# Altium PCB racer_pcb.PcbDoc (part 2 of 2)
Units mm, origin at the board's own origin, x right, y up, seen from the top; angles counter-clockwise.
Board outline 64 x 85 mm, 4 copper layers (Top Layer, Ground Plane, Power Plane, Bottom Layer), stack 0.844 mm thick; 108 components, 67 nets, 325 pads, 88 vias.
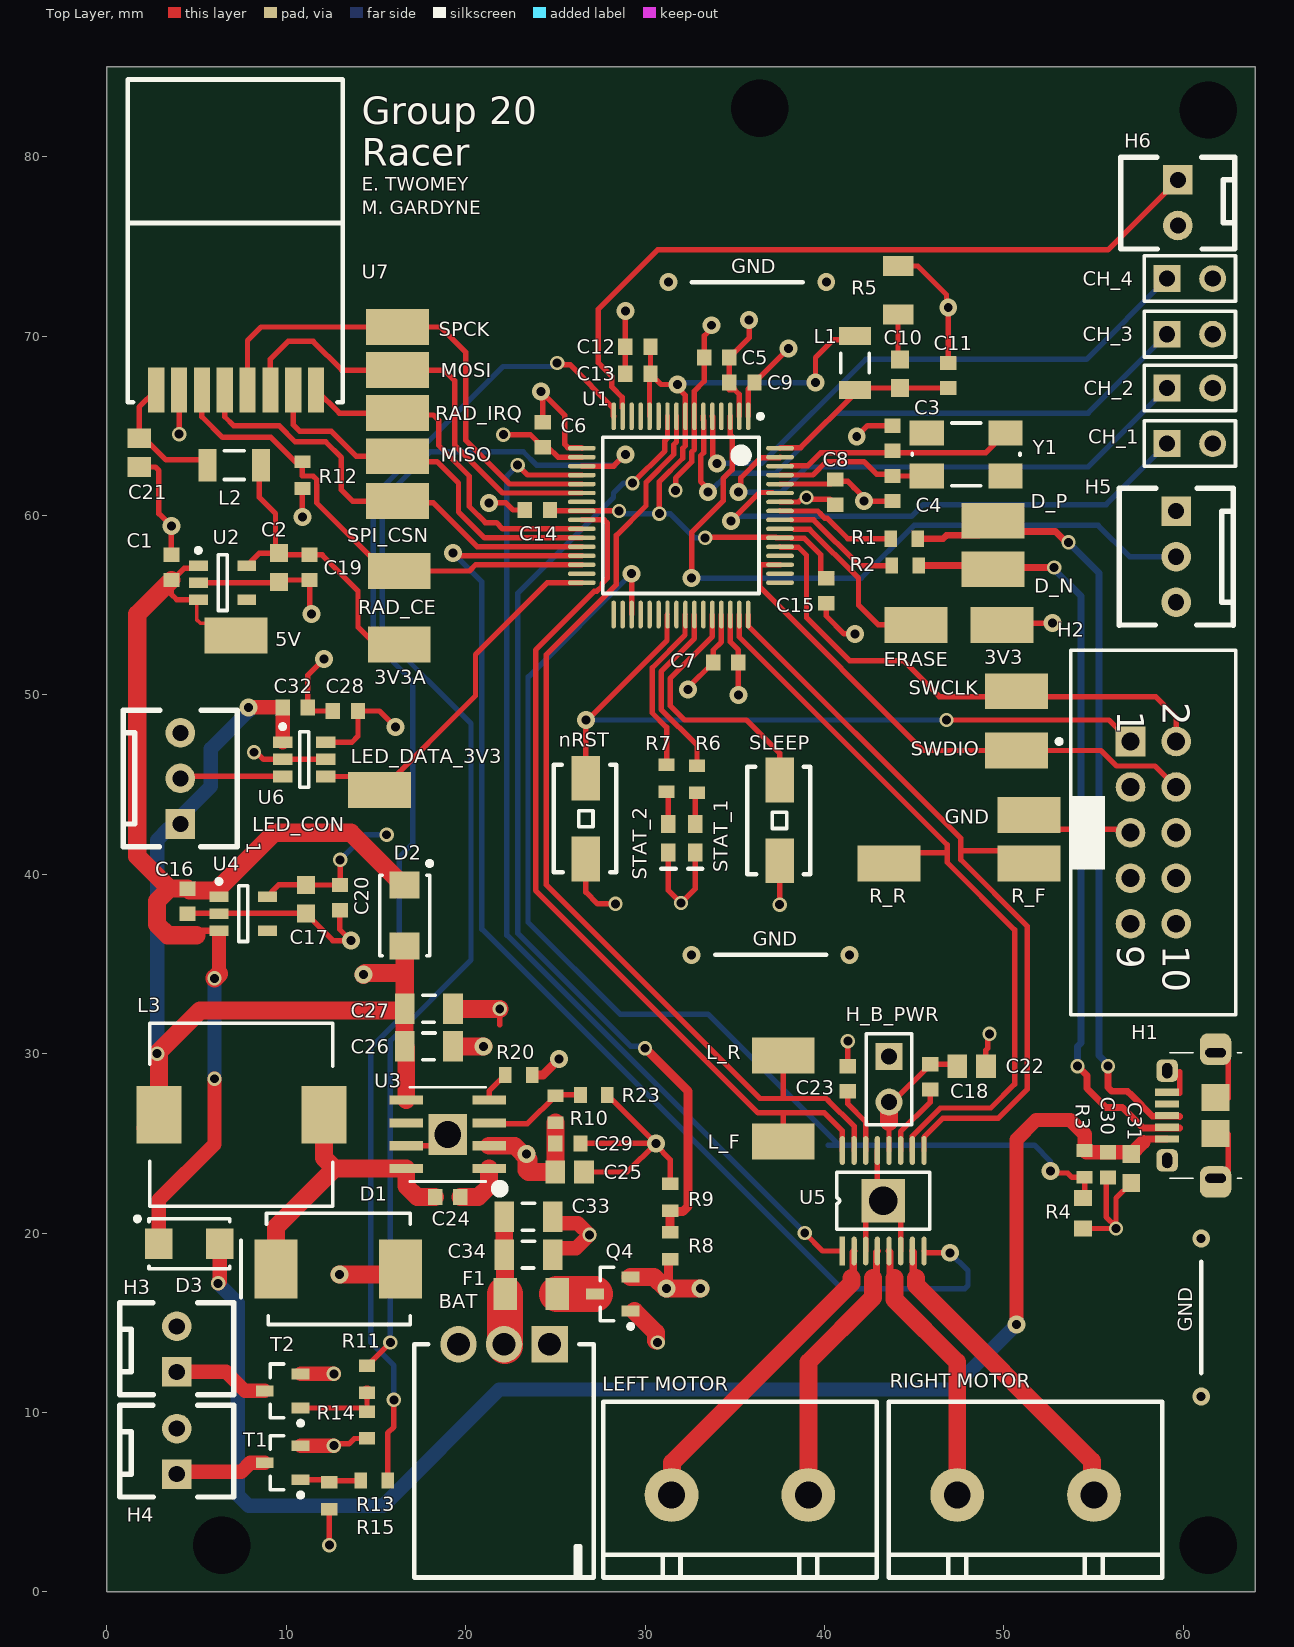
[diagram p0: Top Layer view]

## Polygon pours and split planes (outlines as drawn) (continued)
5V_REG on Power Plane (split plane): 14.371,58.846 14.371,41.4 14.38,41.35 14.408,41.308 24.287,31.429 22.4,31.429 22.35,31.42 22.308,31.392 21.979,31.062 21.951,31.02 21.941,30.971 21.941,16 21.951,15.95 21.979,15.908 22.021,15.88 22.071,15.871 42.3,15.871 42.35,15.88 42.392,15.908 45.992,19.508 46.02,19.55 46.029,19.6 46.029,31.171 63.49,31.171 63.49,2.484 61.605,0.51 0.51,0.51 0.51,61.171 12.046,61.171
3V3D on Power Plane (split plane): 63.49,82.738 63.49,31.429 24.654,31.429 14.629,41.454 14.629,58.9 14.62,58.95 14.592,58.992 12.192,61.392 12.15,61.42 12.1,61.429 0.51,61.429 0.51,66.5 13.2,66.5 13.2,71.9 23.9,71.9 30.1,78.1 30.1,84.49 62.088,84.49

## Other copper
Top Layer:
  pour cut-out: 0.1,72 0.2,71.9 24,71.9 30.2,78.1 30.2,85 0.1,85
Bottom Layer:
  pour cut-out: 0.1,72 0.2,71.9 24,71.9 30.2,78.1 30.2,85 0.1,85
Ground Plane (plane layer: these items are gaps in the copper):
  pour cut-out: 61.4,0.4 63.5,0.4 63.5,2.6
  pour cut-out: 61.89,84.69 63.49,84.69 63.59,84.59 63.49,84.49 63.49,82.69
  pour cut-out: 0,72 0.1,71.9 23.9,71.9 30.1,78.1 30.1,85 0,85
  pour cut-out: 13,66.8 13,85.6 -0.5,85.6 -0.5,66.8
Power Plane (plane layer: these items are gaps in the copper):
  pour cut-out: 0.3,72.5 0.5,72.7 13.2,72.7 13.2,66.5 0.3,66.5 0.3,67.3 0.2,67.4
  pour cut-out: 61.5,0.4 63.6,0.4 63.6,2.6
  pour cut-out: 62,84.6 63.6,84.6 63.7,84.5 63.6,84.4 63.6,82.6
  pour cut-out: 0,72 0.1,71.9 23.9,71.9 30.1,78.1 30.1,85 0,85
  lines w0.254: -1.6,61.3 12.1,61.3 14.5,58.9 14.5,41.4 24.6,31.3 ; 45.9,31.3 45.9,19.6 42.3,16 22.071,16 22.071,30.971 22.4,31.3 24.6,31.3 ; 63.5,31.3 27.7,31.3 24.6,31.3

## Silkscreen, mask and mechanical layers (free items; w line width, h text height)
Top Overlay:
  lines w0.254: 32.6,73 38.8,73 ; 33.9,35.5 40.1,35.5 ; 61,12.2 61,18.4
  text "Group 20" at 14.2,81.8 h1.52
  text "Racer" at 14.2,79.5 h1.52
  text "E. TWOMEY" at 14.2,78.1 h0.76
  text "M. GARDYNE" at 14.2,76.8 h0.76
  text "GND" at 34.8,73.5 h0.8
  text "GND" at 36,36 h0.8
  text "GND" at 60.5,14.5 h0.8 r90
Board Outline:
  the board outline again, w0.254

## Dimensions
0,86 to 64,86 on Mechanical 1
65,85 to 65,0 on Mechanical 1

## Text inside footprints (layer, text, board x,y; h text height)
H1: Mechanical 1 "PCB Edge" at 64.07,24.4 h0.52 r90
H2: Top Overlay "9" at 56.31,36.04 h1.5 r270; Top Overlay "10" at 58.85,36.04 h1.5 r270; Top Overlay "1" at 56.31,49.1 h1.5 r270; Top Overlay "2" at 58.85,49.6 h1.5 r270
LED_CON: Top Overlay "1" at 7.8,41.8 h0.8 r270
U3: Mechanical 13 "*" at 20.93,24.344 h1.27 r180